# Altium PCB GRF2071_testboard.PcbDoc
Units mm, origin at the board's own origin, x right, y up, seen from the top; angles counter-clockwise.
Board outline 34.29 x 30.35 mm, 2 copper layers (Top Layer, Bottom Layer); 10 components, 7 nets, 34 pads, 3 vias.
Unrouted connection lines stored in the file: 29.
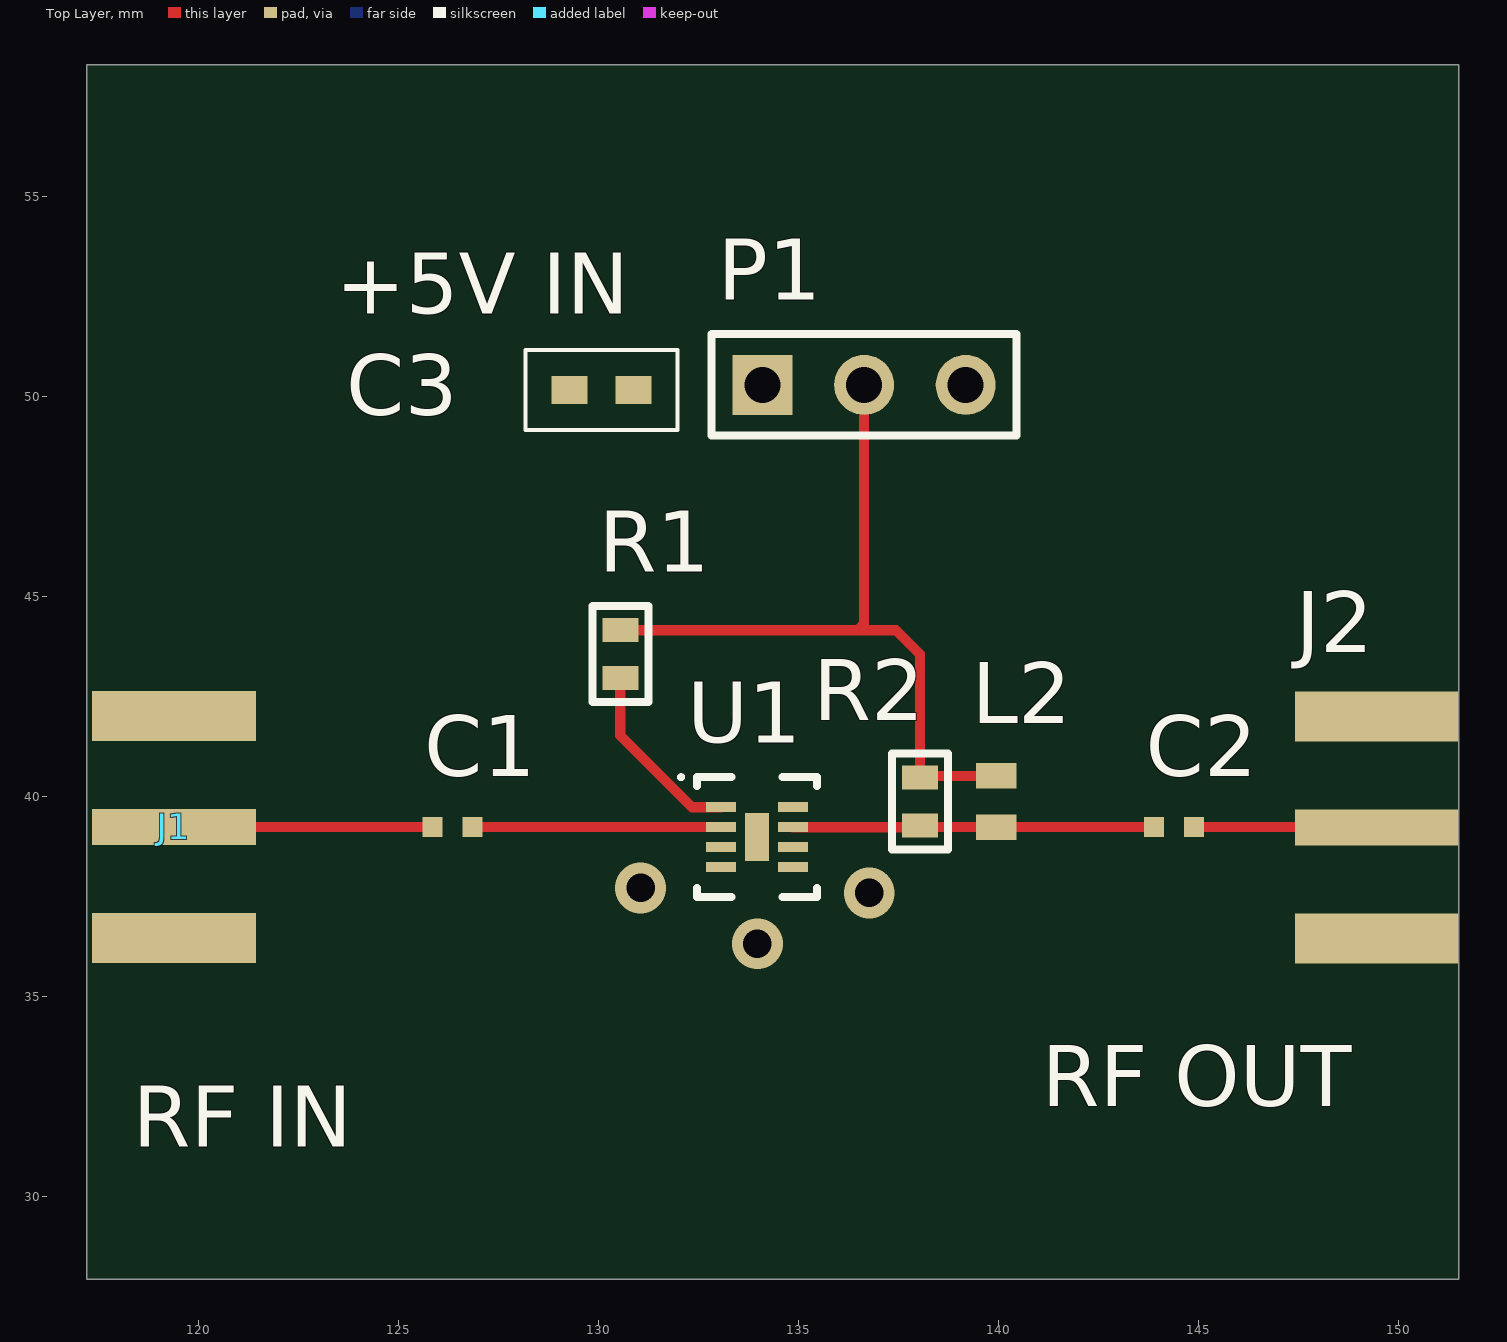
[diagram p0: Top Layer view]
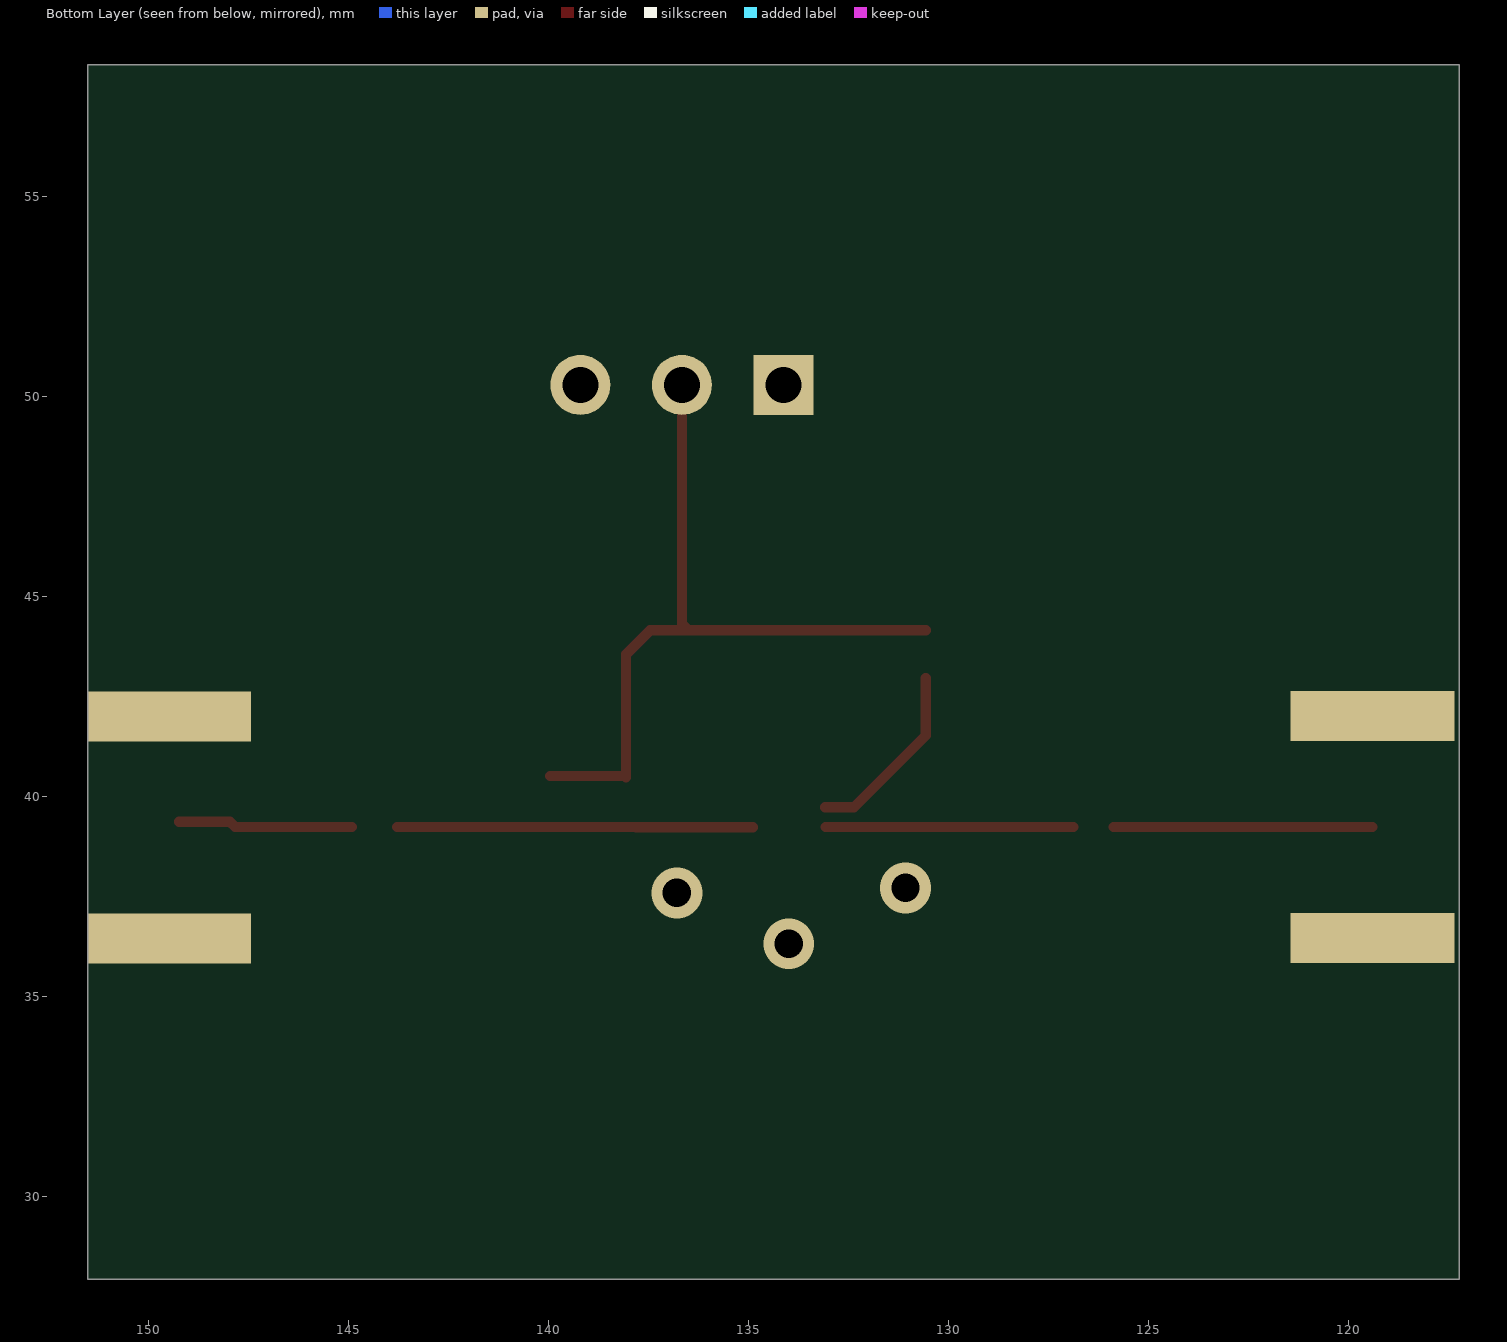
[diagram p1: Bottom Layer view, seen from below]

## Layer stack, top to bottom
Top Solder: solder mask 0.0102, Solder Resist, Dk 3.5
Top Layer: signal copper 0.0356
Dielectric 1: dielectric 0.32, FR-4, Dk 4.8
Bottom Layer: signal copper 0.0356
Bottom Solder: solder mask 0.0102, Solder Resist, Dk 3.5

## Board outline
117.221,27.94 151.511,27.94 151.511,58.293 117.221,58.293

## Design rules (kind name [scope] priority, off if disabled: settings)
Clearance [All] p1: gap=0.254 ignorepadtopadclearanceinfootprint=FALSE except(0: Arc-Hole Track-Hole SMDPad-Hole THPad-Hole Via-Hole Fill-Hole Poly-Hole Region-Hole Text-Hole)
PolygonConnect [All] p1: connectstyle=Relief reliefconductorwidth=0.254 reliefentries=4 polygonreliefangle="90 Angle" airgapwidth=0.254
RoomDefinition GRF2071_testboard [InComponentClass('GRF2071_testboard')] p1: confinementstyle=ConfineIn formatcopy=TRUE lockcomponents=FALSE outline 178.943,26.924 212.598,26.924 212.598,41.656 178.943,41.656
RoutingVias [All] p1: holewidth=0.711 width=1.27 viastyle="Through Hole" minholewidth=0.711 minwidth=1.27 maxholewidth=0.711 maxwidth=1.27
SolderMaskExpansion [All] p1: expansion=0.102 istentingtop=FALSE
Width [All] p1: maxlimit=0.254 minlimit=0.254 preferedwidth=0.254
30 further rules are at their usual default settings.

## Components (designator, comment, footprint, x,y, rotation, side; value= is the part's Value field where it differs from the comment)
C1 "22pF" WCAP-CSRF_0402_L1W0.5H0.5 126.365,39.243 r0 top
C2 "22pF" WCAP-CSRF_0402_L1W0.5H0.5 144.399,39.243 r0 top
C3 "10nF 0603 NP0" C0603_murata 130.086,50.165 r180 top
J1 "60312202111527" 60312202111527 111.76,39.243 r270 top
J2 "60312202111527" 60312202111527 157.114,39.224 r90 top
L2 "15nH, 1.2A" "WE-KI HC_0603" 139.954,39.878 r90 top
P1 "Header 3" HDR1X3 134.112,50.292 r0 top
R1 "1k 0603 1%" R0603 130.556,43.561 r90 top value=1k
R2 "150R 0603 1%" R0603 138.049,39.878 r90 top value=150R
U1 "GRF2071W" GRF_DFN8_2x2mm 133.974,38.985 r0 top

## Footprints (in the part's own frame and the unit in brackets; to place one, negate y for a bottom-side part, rotate by r counter-clockwise, add the part's x,y. Pads: shape width x height; smd on the part's side, far side on the other; paste and mask are expansions set on the pad)
60312202111527 [mm] "SMA PCB End Launch  Jack"
  rect 0.9x4.1 smd: 1(0,7.635)
  rect 1.25x4.1 smd: 2(-2.775,7.635) 3(2.775,7.635)
  rect 1.25x4.1 smd far side: 4(-2.775,7.635) 5(2.775,7.635)
  body extent -3.17,-3.94 3.17,9.39, height 3.55
C0603_murata [mm]
  rect 0.9x0.7 smd: 1(-0.8,0) 2(0.8,0)
  silkscreen extent -1.9,-1 1.9,1
GRF_DFN8_2x2mm [mm] "DFN8 8-Leads, Body 2,00x2,00mm, Pitch 0,50mm, Thermal Pad 1,20x0,60mm, IPC Low Density"
  rect 0.75x0.25 smd: 1(-0.9,0.75) 2(-0.9,0.25) 3(-0.9,-0.25) 4(-0.9,-0.75) 5(0.9,-0.75) 6(0.9,-0.25) 7(0.9,0.25) 8(0.9,0.75)
  rect 0.6x1.2 smd: 9(0,0)
  silkscreen extent -1.95,-1.5 1.5,1.55, body extent -1,-1 1,1, height 0.75
HDR1X3 [mm] "Connector; Header; 3 Position"
  rect 1.5x1.5 hole 0.9: 1(0,0)
  round 1.5 hole 0.9: 2(2.54,0) 3(5.08,0)
  silkscreen extent -1.27,-1.27 6.35,1.27
R0603 [mm]
  rect 0.6x0.9 smd: 1(-0.6,0) 2(0.6,0)
  silkscreen extent -1.2,-0.7 1.2,0.7
WCAP-CSRF_0402_L1W0.5H0.5 [mm] "Radio Frequency MLCC, body 1x0.5mm"
  rect 0.5x0.5 smd: 1(-0.5,0) 2(0.5,0)
  body extent -0.5,-0.25 0.5,0.25, height 0.5
"WE-KI HC_0603" [mm] "SMD Inductor, body 1.70x1.10mm"
  rect 0.64x1.02 smd: 1(-0.64,0) 2(0.64,0)
  body extent -0.85,-0.55 0.85,0.55, height 0.92

## Part data
C1 C2: library part 885392005114, "WCAP-CSRF Multilayer Ceramic Chip Capacitor, High Frequency, 0402, NP0 Class I, 22pF, 50VDC", Capacitance Tolerance=+/-5%, Case/Size Code=0402, Insulation Resistance=10GOhm, Manufacturer="Wurth Elektronik", Operating Temperature Max=125°C, Operating Temperature Min=-55°C, Rated Voltage (DC)=50V, Capacitance=22pF, Category="Multilayer Ceramic Chip Capacitors", Ceramic Type="NP0 Class I", ComponentLink1Description="Manufacturer Link", ComponentLink1URL=https://www.we-online.com/redexpert/article/885392005114?ad, ComponentLink2Description=Datasheet, ComponentLink2URL=https://www.we-online.com/redexpert/spec/885392005114?ad, Height=0.5mm, Length=1mm, Manufacturer Part Number=885392005114, Match Code=WCAP-CSRF, Mount="Surface Mount", Packaging="Tape and Reel", Q Factor=840, Technical Reference=NP00402220J050DFCT1R000, Width=0.5mm
C3: library part "CAP 10nF 0603 NP0", "10nF 0603 NP0 muRata", Capacitance=10nF, Case Code (Imperial)=0603, Case Code (Metric)=1608, Dielectric=C0G, Manufacturer 1=Murata, Manufacturer Part Number 1=GRM1885C1H103JA01D, Max Operating Temperature=125°C, Min Operating Temperature=-55°C, Package Quantity=4000, Supplier Part Number 1=81-GRM1885C1H103JA1D, Tolerance=5%, Voltage=50V, Case/Package=0603, ComponentLink1Description=https://datasheet.ciiva.com/41860/partnumbering-e-01-41860759.pdf, ComponentLink1URL=https://datasheet.ciiva.com/41860/partnumbering-e-01-41860759.pdf, ComponentLink2Description=https://datasheet.ciiva.com/29537/partnumbering-e-01-29537910.pdf, ComponentLink2URL=https://datasheet.ciiva.com/29537/partnumbering-e-01-29537910.pdf, Depth=0.8mm, Height=0.8mm, Lead Free="Lead Free", Lead Pitch=0.5mm, Length=1.6mm, Material=Ceramic, Packaging="Tape and Reel", Pricing 1="1=0.13, 10=0.05, 50=0.05, 100=0.035, 1000=0.024, 10000=0.016 (USD)", REACH SVHC="No SVHC", Stock 1=5, Supplier 1=Mouser, Termination=SMD/SMT, Thickness=0.035inch, Voltage Rating=50V, Voltage Rating (DC)=50V, Width=0.8mm
J1 J2: "WR-SMA Connector, PCB End Launch Jack, 6.35SQ Flange Round Post for PCB 1.6mm, DC~18GHz, 50Ohm", Frequency Range=DC~18GHz, Manufacturer="Wurth Elektronik", Operating Temperature="-65 to +165degC", Center Contact Diameter=0.76mm, ComponentLink1Description=Manufacturer, ComponentLink1URL=http://www.we-online.de, ComponentLink2Description=Datasheet, ComponentLink2URL=https://www.we-online.com/catalog/datasheet/60312202111527.pdf, Connector Type=SMA, Gender=Jack, Impedance=50Ohm, Interface=MIL-STD-348, Manufacturer Part Number=60312202111527, Mounting Technology="End Launch", Orientation Type=Straight, Packaging=Tray, Published Date="November 2021"
L2: library part 744917115, "WE-KI HC SMT High Current Wire Wound Ceramic Inductor, size 0603, 15nH, 1.2A", Case/Size Code=0603, DC Resistance Max=0.078Ohm, Inductance=15nH, Inductance Tolerance=+/-2%, Manufacturer="Wurth Elektronik", Operating Temperature Max=125°C, Operating Temperature Min=-40°C, Rated Current=1.2A, Self Resonant Frequency=3600MHz, Category="RF Inductors", ComponentLink1Description="Manufacturer Link", ComponentLink1URL=http://www.we-online.de, ComponentLink2Description=Datasheet, ComponentLink2URL=https://www.we-online.com/catalog/datasheet/744917115.pdf, Height=0.9mm, Length=1.7mm, Manufacturer Part Number=744917115, Match Code="WE-KI HC", Mount=SMT, Packaging="Tape and Reel", Q Factor=38, Width=1.1mm
P1: "Header, 3-Pin", LatestRevisionDate=17-Jul-2002, LatestRevisionNote="Re-released for DXP Platform.", Publisher="Altium Limited"
R1: library part "RES 1k 0603", Case=0603, Tolerance=1%, Publisher=iv
R2: library part "RES 150R 0603", Case=0603, Tolerance=1%, Publisher=iv
U1: "0.7 - 2.7 GHz Ultra-Low Noise Amplifier AEC-Q100", Case/Package=DFN8, Frequency="0.7 - 2.7 GHz", Manufacturer 1=GuerillaRF, Manufacturer Part Number 1=GRF2071-W, Supplier Part Number 1=459-GRF2071W, Supply Voltage=5V, ComponentLink1Description=https://www.verical.com/server-webapp/html/getDatasheet?partID=559390, ComponentLink1URL=https://www.verical.com/server-webapp/html/getDatasheet?partID=559390, Gain=19dB, Mount="Surface Mount", Number of Channels=1, P1dB=+21dBm, Radiation Hardening=No, Stock 1=0, Supplier 1=Mouser

## Via types
v1: diameter 1.27, hole 0.711, Top Layer to Bottom Layer, 3 vias

## Nets (pads, with @x,y where several pads share a name; then routed paths per layer and width w, separated by ;. In a path a pad name is that pad's centre, name@x,y a point inside that pad or via, vN(x,y) a via of type N, cw(c..) or ccw(c..) an arc to the next point about the centre after c; other vN are vias at no path point)
5V: C3.2 L2.2 P1.2 R1.2 R2.2
GND: C3.1 J1.2 J1.3 J1.4 J1.5 J2.2 J2.3 J2.4 J2.5 P1.1 P1.3 U1.3 U1.4 U1.5 U1.8 U1.9
  other v1: 133.985,36.322 136.779,37.592 131.064,37.719
NetC1_1: C1.1 J1.1
NetC1_2: C1.2 U1.2
NetC2_1: C2.1 L2.1 R2.1 U1.7
NetC2_2: C2.2 J2.1
NetR1_1: R1.1 U1.1
pads on no net: U1.6
copper on no net: | length 49.6
  Top Layer w0.254: 119.395,39.243 125.865,39.243 ; 126.865,39.243 133.066,39.243 ; 130.556,42.961 130.556,41.529 132.35,39.735 133.074,39.735 ; 130.556,44.161 136.49,44.161 ; 134.874,39.235 137.803,39.235 137.811,39.243 143.772,39.243 ; 136.652,50.292 136.652,44.323 136.49,44.161 ; 139.954,40.518 138.089,40.518 138.049,40.478 138.049,43.561 137.449,44.161 136.49,44.161 ; 144.899,39.243 147.828,39.243 147.955,39.37 149.225,39.37

## Silkscreen, mask and mechanical layers (free items; w line width, h text height)
Top Overlay:
  text "+5V IN" at 123.444,52.07 h1.52
  text "RF OUT" at 141.097,32.258 h1.52
  text "RF IN" at 118.364,31.242 h1.52

## Text inside footprints (layer, text, board x,y; h text height)
J1: Mechanical 2 "PCB END" at 116.095,41.443 h0.76 r270
J2: Mechanical 2 "PCB END" at 152.779,37.024 h0.76 r90